# Altium PCB 基于NB-IOT光照计设计电路.PcbDoc
Units mil, origin at the board's own origin, x right, y up, seen from the top; angles counter-clockwise.
Board outline 6000 x 4000 mil, 2 copper layers (Top Layer, Bottom Layer); 31 components, 43 nets, 205 pads, 0 vias.
Unrouted connection lines stored in the file: 3.
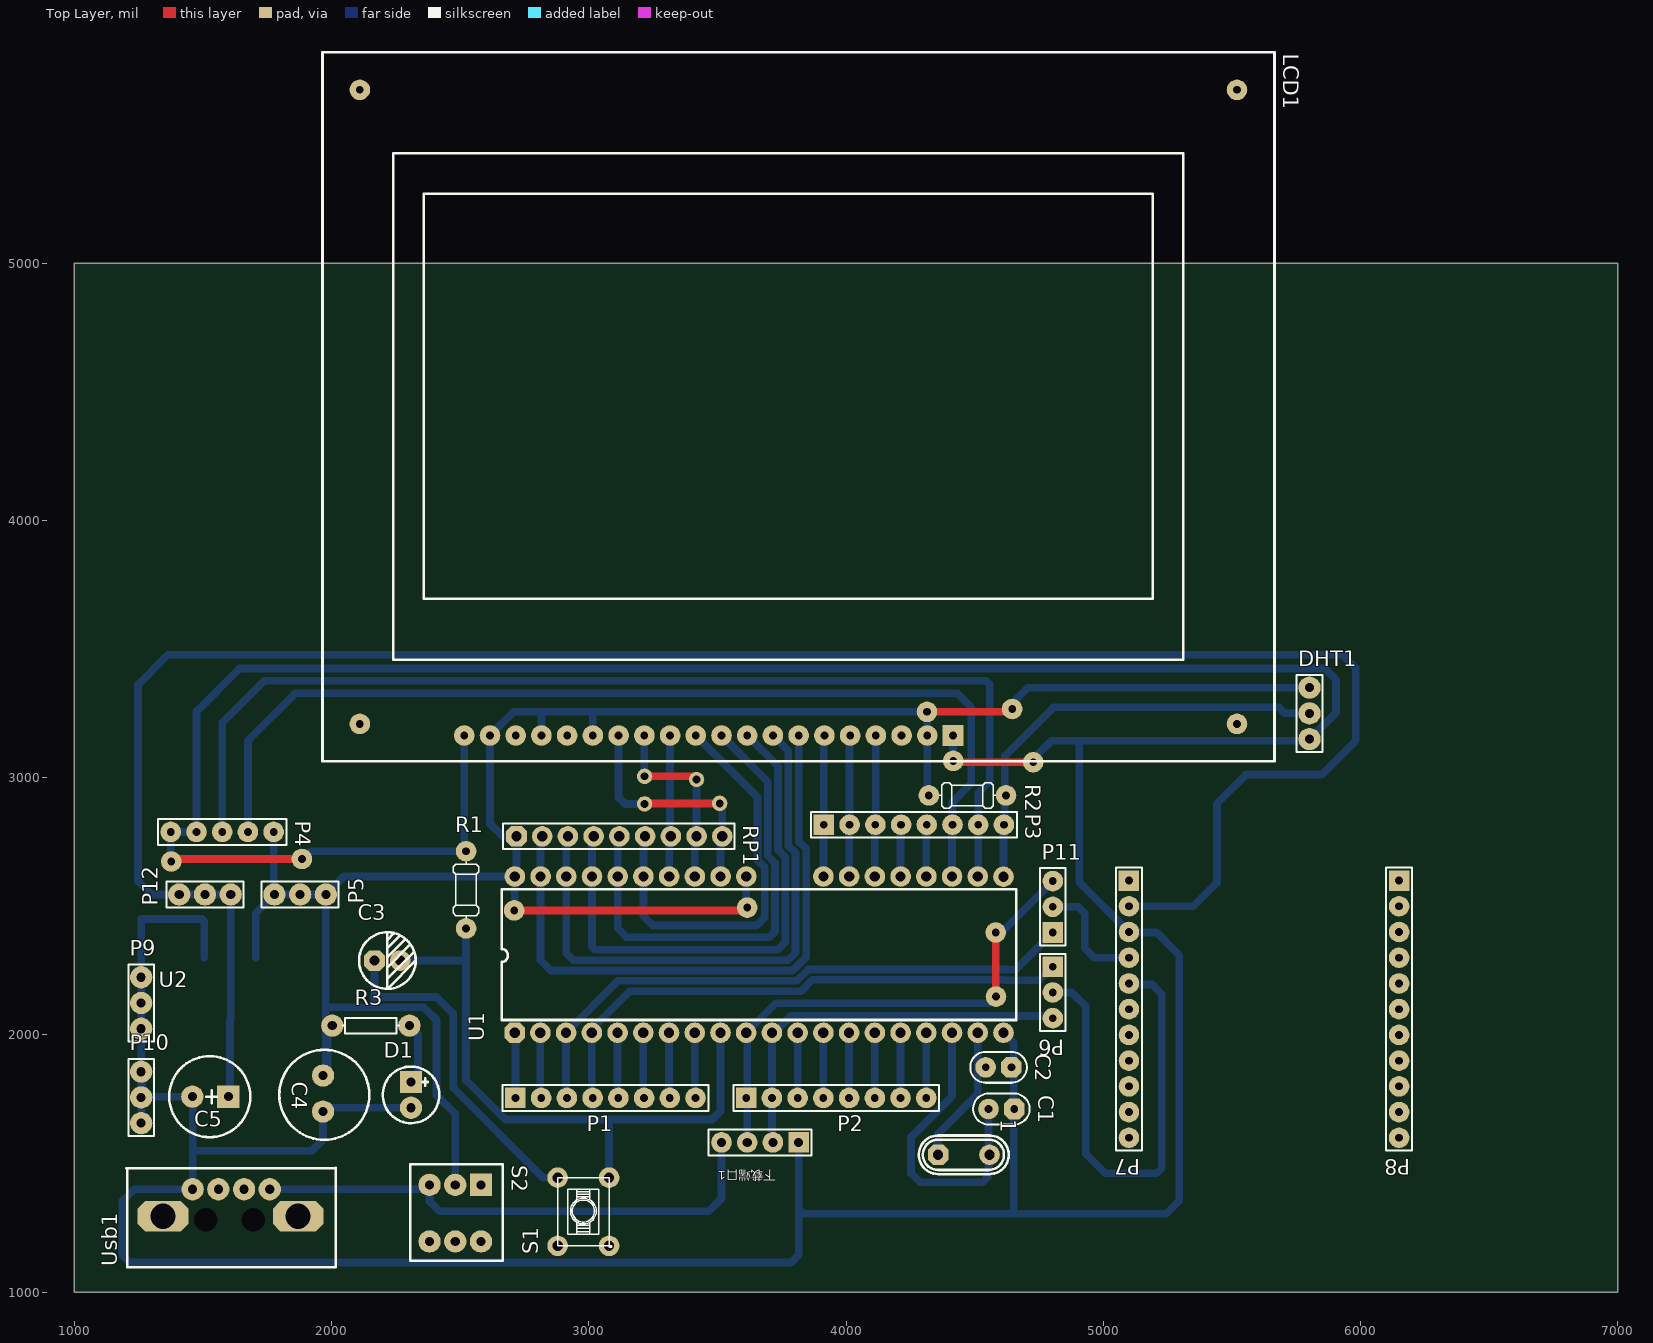
[diagram p0: Top Layer view]
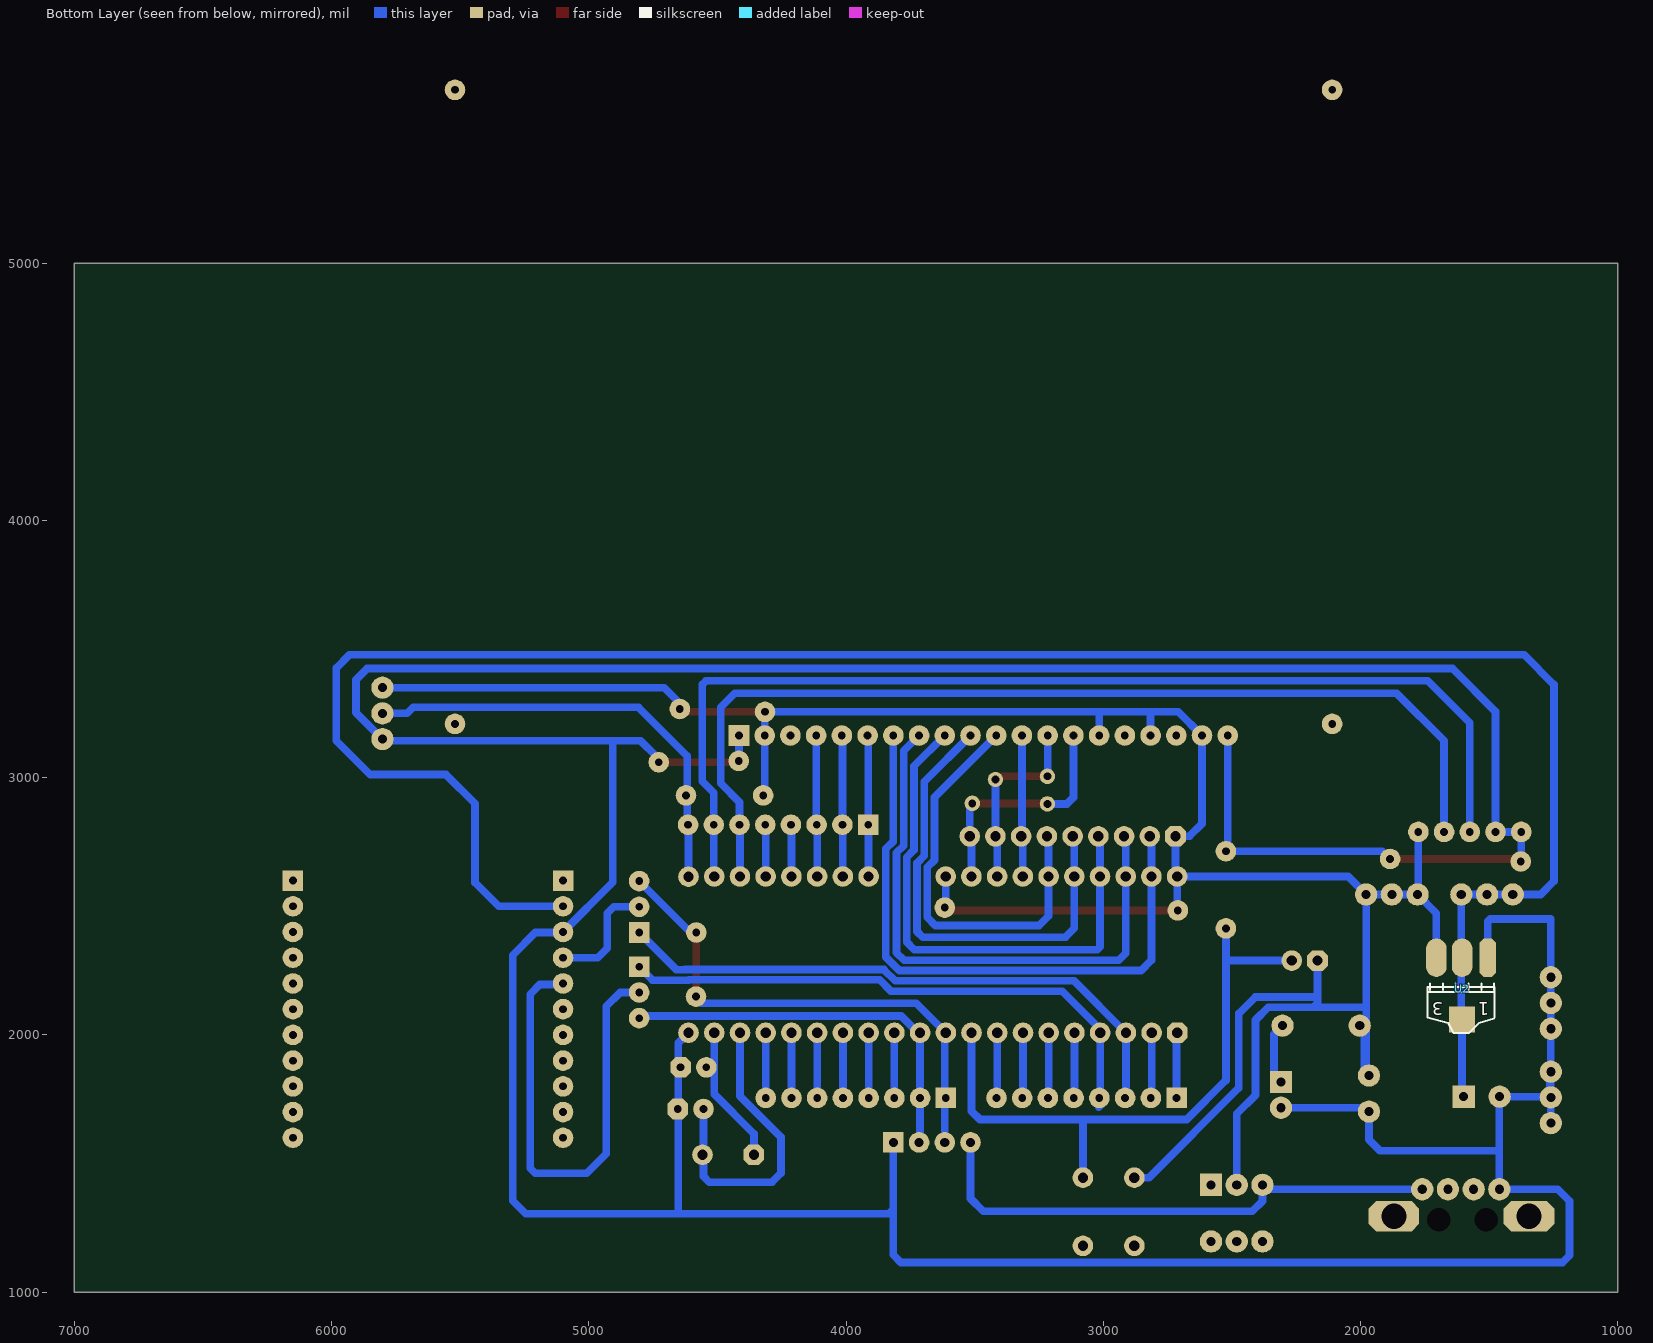
[diagram p1: Bottom Layer view, seen from below]

## Layer stack, top to bottom
Top Layer: signal copper 1.4
Dielectric: dielectric 12.6, FR-4, Dk 4.8
Bottom Layer: signal copper 1.4

## Board outline
1000,1000 7000,1000 7000,5000 1000,5000

## Design rules (kind name [scope] priority, off if disabled: settings)
Clearance [All] p1: gap=10
PolygonConnect [All] p1: connectstyle=Relief reliefconductorwidth=10 reliefentries=4 polygonreliefangle="90 Angle"
RoutingVias [All] p1: holewidth=28 width=50 viastyle="Through Hole" minholewidth=28 minwidth=50 maxholewidth=28 maxwidth=50
SilkscreenOverComponentPads [IsPad] p1: minsilkscreentomaskgap=10
SolderMaskExpansion [All] p1: expansion=4
Width [All] p1: maxlimit=50 minlimit=30 preferedwidth=40 minimp=50.000000 maximp=50.000000 favimp=50.000000
27 further rules are at their usual default settings.

## Components (designator, comment, footprint, x,y, rotation, side; value= is the part's Value field where it differs from the comment)
1 "XTAL" 4.直插晶振 4358,1534 r0 top
C1 "30pf" 2.瓷片电容 4554,1712 r0 top
C2 "30pf" 2.瓷片电容 4543,1874 r0 top
C3 "10UF" C100A 2167,2289 r0 top
C4 "Cap" CAP 1967,1842 r270 top
C5 "Cap Pol1" Cap+ 1599,1760 r180 top
D1 "LED0" LED-2 2309,1817 r0 top
DHT1 "Header 3" HDR1X3#1 5802,3150 r90 top
LCD1 "" LCD12864 4416,3164 r0 top locked
P1 "Header 8" HDR1X8 2715,1755 r0 top
P2 "Header 8" HDR1X8 3612,1755 r0 top
P3 "Header 8" HDR1X8 3914,2817 r0 top
P4 "Header 5" HDR1X5 1375,2789 r0 top
P5 "" HDR1X3#1 1978,2546 r180 top
P6 "" HDR1X3#2 4804,2265 r270 top
P7 "Header 11" HDR1X11 5100,2600 r270 top locked
P8 "Header 11" HDR1X11 6150,2600 r270 top
P9 "" HDR1X3#1 1260,2024 r90 top
P10 "" HDR1X3#1 1260,1657 r90 top
P11 "" HDR1X3#3 4804,2398 r90 top
P12 "" HDR1X3#1 1608,2546 r180 top
R1 "10K" "R-300 1/4W" 2523,2414 r90 top
R2 "5.1K" "R-300 1/4W" 4322,2931 r0 top
R3 "Res1" AXIAL-0.3 2003,2036 r0 top
RP1 "RESPACK-8" 3.排阻 2719,2772 r0 top
S1 "" KEY1 2879,1180 r90 top
S2 "SW-DPDT" swichX6 2581,1417 r270 top
U1 "STC12C5A60S2" DIP-40 3657,2312 r90 top locked
U2 "AMS1117-3.3" AMS1117 1505,2305 r180 top
Usb1 "USB" USB-A 1760,1400 r90 top
下载端口1 "气体" HDR1X4 3816,1582 r180 top

## Footprints (in the part's own frame and the unit in brackets; to place one, negate y for a bottom-side part, rotate by r counter-clockwise, add the part's x,y. Pads: shape width x height; smd on the part's side, far side on the other; paste and mask are expansions set on the pad)
2.瓷片电容 [mil]
  oct 80x80 hole 30: 1(100,0)
  round 80 hole 30: 2(0,0)
  silkscreen extent -60,-60 160,60
3.排阻 [mil]
  oct 80x80 hole 40: 1(0,0)
  round 80 hole 40: 2(100,0) 3(200,0) 4(300,0) 5(400,0) 6(500,0) 7(600,0) 8(700,0) 9(800,0)
  silkscreen extent -52,-50 848,50, body extent -40,-25 846,24, height 209
4.直插晶振 [mil]
  oct 80x80 hole 40: 1(0,0)
  round 80 hole 40: 2(200,0)
  silkscreen extent -75,-75 275,75, body extent -111,-90 315,88, height 138
AMS1117 [mil]
  oct 65x150 smd far side: 1(-0.03,4.94)
  rect 100x100 smd far side: 2(-100.03,244.94)
  oval 80x150 smd far side: 2(-100.03,4.94) 3(-200.03,4.94)
AXIAL-0.3 [mm]
  round 2.2 hole 0.9: 1(0,0) 2(7.62,0)
  silkscreen extent 1.04,-0.76 6.58,0.76
C100A [mil]
  oct 80x80 hole 40: 1(0,0)
  round 80 hole 40: 2(100,0)
  silkscreen extent -60,-110 160,110, body extent -74,-123 176,127, height 296
CAP [mm]
  round 2.2 hole 0.9: 1(0,0) 2(3.556,0)
  silkscreen extent -2.54,-4.32 6.35,4.57
Cap+ [mm]
  rect 2.2x2.2 hole 0.9: 1(0,0)
  round 2.2 hole 0.9: 2(3.556,0)
  silkscreen extent -2.16,-4 5.84,4
DIP-40 [mil]
  oct 80x80 hole 40: 1(-303.88,945.19)
  round 80 hole 40: 2(-303.63,845.17) 3(-303.63,745.15) 4(-303.63,645.13) 5(-303.63,545.11) 6(-303.62,445.09) 7(-303.62,345.07) 8(-303.62,245.05) 9(-303.62,145.03) 10(-303.62,45.01) 11(-303.62,-55.01) 12(-303.62,-155.03) 13(-303.62,-255.05) 14(-303.62,-355.07) 15(-303.62,-455.09) 16(-303.62,-555.11) 17(-303.62,-655.13) 18(-303.62,-755.15) 19(-303.62,-855.17) 20(-303.62,-955.19) 21(303.04,-955.19) 22(303.88,-855.21) 23(303.88,-755.23) 24(303.88,-655.25) 25(303.88,-555.28) 26(303.88,-455.3) 27(303.88,-355.32) 28(303.88,-255.34) 31(303.88,44.59) 32(303.88,144.57) 33(303.88,244.55) 34(303.88,344.53) 35(303.88,444.5) 36(303.87,544.48) 37(303.87,644.46) 38(303.87,744.44) 39(303.87,844.42) 40(303.87,944.39)
  round 0 all layers, no hole: 29(303.88,-155.36) 30(303.88,-55.39)
  silkscreen extent -254,-1005 254,996, body extent -304,-1031 306,1034, height 224
HDR1X3#1 [mm] "Conn"
  round 2.2 hole 0.9: 1(0,0) 2(2.54,0) 3(5.08,0)
  silkscreen extent -1.27,-1.27 6.35,1.27
HDR1X3#2 [mm]
  rect 2.032x2.032 hole 0.762 paste+0: 1(0,0)
  round 2.032 hole 0.762 paste+0: 2(2.54,0) 3(5.08,0)
  silkscreen extent -1.27,-1.27 6.35,1.27
HDR1X3#3 [mm]
  rect 2.032x2.032 hole 0.762: 1(0,0)
  round 2.032 hole 0.762: 2(2.54,0) 3(5.08,0)
  silkscreen extent -1.27,-1.27 6.35,1.27
HDR1X4 [mil]
  rect 80x80 hole 35.43: 1(0,0)
  round 80 hole 35.43: 2(100,0) 3(200,0) 4(300,0)
  silkscreen extent -50,-50 350,50
HDR1X5 [mil] "Conn"
  round 80 hole 30: 1(0,0) 2(100,0) 3(200,0) 4(300,0) 5(400,0)
  silkscreen extent -50,-50 450,50
HDR1X8 [mil] "Conn"
  rect 80x80 hole 30: 1(0,0)
  round 80 hole 30: 2(100,0) 3(200,0) 4(300,0) 5(400,0) 6(500,0) 7(600,0) 8(700,0)
  silkscreen extent -50,-50 750,50
HDR1X11 [mil] "Conne"
  rect 80x80 hole 30: 1(0,0)
  round 80 hole 30: 2(100,0) 3(200,0) 4(300,0) 5(400,0) 6(500,0) 7(600,0) 8(700,0) 9(800,0) 10(900,0) 11(1000,0)
  silkscreen extent -50,-50 1050,50
KEY1 [mil]
  round 80 hole 40: 1(0,0) 1(265,0) 2(0,-200) 2(265,-200)
  silkscreen extent -5,-210 265,0, body extent -33,-219 293,37, height 169
LCD12864 [mil]
  round 80 hole 30: 0(-2306,45) 0(-2306,2510) 0(1104,45) 0(1104,2510) 2(-100,0) 3(-200,0) 4(-300,0) 5(-400,0) 6(-500,0) 7(-600,0) 8(-700,0) 9(-800,0) 10(-900,0) 11(-1000,0) 12(-1100,0) 13(-1200,0) 14(-1300,0) 15(-1400,0) 16(-1500,0) 17(-1600,0) 18(-1700,0) 19(-1800,0) 20(-1900,0)
  rect 80x80 hole 30: 1(0,0)
  silkscreen extent -2451,-100 1250,2656
LED-2 [mm]
  rect 2.2x2.2 hole 0.9: 1(0,0)
  round 2.2 hole 0.9: 2(0,-2.54)
  silkscreen extent -2.79,-4.06 2.79,1.52
"R-300 1/4W" [mil]
  round 80 hole 30: 1(0,0) 2(300,0)
  silkscreen extent 40,-50 260,50, body extent -10,-41 310,35, height 93
swichX6 [mm]
  rect 2.2x2.2 hole 0.9: 1(0,0)
  round 2.2 hole 0.9: 2(0,-2.54) 3(0,-5.08) 4(5.588,-5.08) 5(5.588,-2.54) 6(5.588,0)
  silkscreen extent -2.03,-6.98 7.49,2.16
USB-A [mm]
  round 2.2 hole 0.9: 1(0,0) 2(0,2.54) 3(0,5.08) 4(0,7.62)
  round 2.032 hole 2.3: 5(-3.006,6.331) 5(-3.006,1.632)
  oct 3x5 hole 2.5: 5(-2.667,10.541) 5(-2.667,-2.794)
  silkscreen extent -7.71,-6.5 2.13,14.15

## Part data
C4: "C"
C5: "Polarized Capaci"
D1: "Typical INFRA"
DHT1: "Header, 3-Pin"
P1 P2 P3: "Header, 8-Pin"
P4: "Header, 5-Pin"
P5 P6 P9 P10 P11 P12: library part "Header 3", "Header, 3-Pin"
P7 P8: "Header, 11-Pin"
S2: "Double-Pole, Double-Thro"
下载端口1: library part "Header 4"

## Free pads (board coordinates)
  round 80 hole 30: 0(3616,2495) 0(4582,2398) 1(2710,2484) 1(4583,2149) 6(1885,2684) 7(1377,2674) 8(4315,3256) 9(4646,3267) 10(4417,3065) 11(4728,3060)
  round 60 hole 30: 2(3217,2898) 3(3217,3005) 4(3509,2900) 5(3419,2993)

## Nets (pads, with @x,y where several pads share a name; then routed paths per layer and width w, separated by ;. In a path a pad name is that pad's centre, name@x,y a point inside that pad or via, vN(x,y) a via of type N, cw(c..) or ccw(c..) an arc to the next point about the centre after c; other vN are vias at no path point)
CLK: DHT1.2 P3.8 R2.2 U1.21 | length 1753.2
  Bottom Layer w30: U1.21 4612.19,2815.19 P3.8 ; P3.8@4636,2815 4617,2834 4617,3084 4807,3274 5682,3274 5706,3250 DHT1.2
EN: LCD1.6 P3.1 U1.28 | length 546.8
  Bottom Layer w30: U1.28 3912.34,2815.34 P3.1 LCD1.6@3914,3162
GND: C1.1 C2.1 C4.2 C5.2 D1.2 DHT1.1 LCD1.1 LCD1.20 P4.1 P4.2 P7.3 P9.1 P9.2 P9.3 P10.1 P10.2 P10.3 pad.6 pad.7 pad.10 pad.11 R1.2 U1.20 U2.1 Usb1.4 下载端口1.1 | length 19232.5
  Top Layer w30: pad.7@1377,2684 pad.6 ; pad.10@4422,3060 pad.11
  Bottom Layer w30: P10.1@1239,1678 P10.1 P10.2 P10.3@1260,1851 ; pad.7 1375,2676 P4.1 P4.2 1475,3257 1642,3424 5862,3424 5905,3381 5905,3253 DHT1.1 5796,3144 4907,3144 ; U2.1 1505.03,2441.97 1496,2451 1260,2451 P9.3 P9.2 P9.1 P10.3 P10.3@1260,1851 ; pad.6 1915,2714 R1.2 ; D1.2 1982,1717 C4.2 1967,1593 1924,1550 1460,1550 ; R1.2@2516,2721 LCD1.20 ; 3816,1322 3833,1305 5245,1305 5296,1356 5296,2310 5208,2398 P7.3@5110,2398 ; 下载端口1.1 3816,1145 3786,1115 1215,1115 1187,1143 1187,1354 1233,1400 Usb1.4 1460,1550 ; LCD1.1 4416,3082 pad.10@4417,3081 ; U1.20 4652,1968.56 4652,1305 ; pad.11@4736,3081 4799,3144 4907,3144 ; P7.3 4907,2593 4907,3144 ; P10.3@1260,1851 1263,1854 1263,1760 C5.2 1460,1759 1460,1550
NC: P7.1 P8.1
NetD1_1: D1.1 R3.2 | length 181
  Bottom Layer w30: D1.1@2336,1822 2336,2003
NetP1_1: P1.1 U1.1 | length 249.9
  Bottom Layer w30: P1.1 U1.1@2715,2004.94
NetP1_2: P1.2 U1.2 | length 254.7
  Bottom Layer w30: U1.2 2811.83,1758.17 P1.2
NetP1_5: P1.5 U1.5 | length 250.3
  Bottom Layer w30: P1.5@3111.89,1758.11 U1.5
NetP1_6: P1.6 U1.6 | length 254.7
  Bottom Layer w30: U1.6 3211.91,1758.09 P1.6
NetP1_7: P1.7 U1.7 | length 254.6
  Bottom Layer w30: U1.7 3311.93,1758.07 P1.7
NetP1_8: P1.8 U1.8 | length 254.6
  Bottom Layer w30: U1.8 3411.95,1758.05 P1.8
NetP2_3: P2.3 U1.12 | length 253.4
  Bottom Layer w30: P2.3 U1.12
NetP2_4: P2.4 U1.13 | length 253.4
  Bottom Layer w30: P2.4 P2.4 U1.13
NetP2_5: P2.5 U1.14 | length 253.4
  Bottom Layer w30: P2.5 4012.07,1755.07 U1.14
NetP2_6: P2.6 U1.15 | length 253.4
  Bottom Layer w30: P2.6 4112.09,1755.09 U1.15
NetP2_7: P2.7 U1.16 | length 253.4
  Bottom Layer w30: P2.7 4212.11,1755.11 U1.16
NetP2_8: P2.8 U1.17 | length 253.4
  Bottom Layer w30: P2.8 4312.13,1755.13 U1.17
NetP3_4: P3.4 U1.25 | length 201.8
  Bottom Layer w30: U1.25 4212.28,2815.28 P3.4
NetP3_5: P3.5 U1.24 | length 201.8
  Bottom Layer w30: U1.24 4312.25,2815.25 P3.5
NetP6_2: P6.2 P7.5 | length 1885.9
  Bottom Layer w30: P6.2 4878,2165 4932,2111 4932,1538 5008,1462 5208,1462 5228,1482 5228,2158 5190,2196 P7.5@5093,2196
NetP7_4: P7.4 P11.2 | length 457.7
  Bottom Layer w30: P11.2 4903,2498 4928,2473 4928,2337 4965,2300 P7.4
P0.0: LCD1.7 RP1.2 U1.39 | length 2428.4
  Bottom Layer w30: RP1.2 2812.58,2765.58 U1.39 2812.58,2290.42 2853,2250 3792,2250 3845,2303 3845,2723 3816,2752 LCD1.7
P0.1: LCD1.8 RP1.3 U1.38 | length 2252.9
  Bottom Layer w30: RP1.3 2912.56,2765.56 U1.38 2912.56,2317.44 2940,2290 3774,2290 3804,2320 3804,2707.43 3776,2735.43 3776,3104 LCD1.8
P0.2: LCD1.9 RP1.4 U1.37 | length 2065.2
  Bottom Layer w30: RP1.4 3012.54,2765.54 U1.37 3012.54,2342.46 3024,2331 3734,2331 3764,2361 3764,2690.86 3736,2718.86 3736,3044 LCD1.9
P0.3: LCD1.10 RP1.5 U1.36 | length 1843.2
  Bottom Layer w30: RP1.5 3112.52,2765.52 U1.36 3112.52,2414.48 3147,2380 3702,2380 3724,2402 3724,2668 3696,2696 3696,2984 LCD1.10
P0.4: LCD1.11 RP1.6 U1.35 | length 1630.5
  Bottom Layer w30: RP1.6 3212.5,2765.5 U1.35 3212.5,2462.5 3250,2425 3652,2425 3684,2457 3684,2651.43 3656,2679.43 3656,2924 LCD1.11
P0.5: LCD1.12 RP1.7 U1.34 | length 552.1
  Bottom Layer w30: U1.34 3312.47,2765.47 RP1.7 3316,2775 LCD1.12
P0.6: LCD1.13 pad.3 pad.5 RP1.8 U1.33 | length 725.9
  Top Layer w30: pad.3 pad.5@3407,3005
  Bottom Layer w30: LCD1.13 3216,3020 pad.3@3219,3017 ; U1.33 3412.45,2765.45 RP1.8 pad.5 3419,2998 pad.5@3417,3000
P0.7: LCD1.14 pad.2 pad.4 RP1.9 U1.32 | length 923.3
  Top Layer w30: pad.2@3219,2900 pad.4
  Bottom Layer w30: LCD1.14 3116,2923 3141,2898 pad.2@3207,2898 ; pad.4 3519,2890 RP1.9 3512.43,2765.43 U1.32
RES: C3.2 R1.1 S1.2 U1.9 | length 2494.2
  Bottom Layer w30: C3.2 2519,2289 ; 2523,2190 2523,2244 ; R1.1 2523,2244 ; S1.2@3079,1445 3079,1668 3082,1671 ; U1.9 3511.97,1703.97 3479,1671 2675,1671 2523,1823 2523,2244
RS: LCD1.4 P3.3 U1.26 | length 549.7
  Bottom Layer w30: U1.26 4112.3,2815.3 P3.3 4116,2819 LCD1.4
RW: LCD1.5 P3.2 U1.27 | length 549.6
  Bottom Layer w30: U1.27 4012.32,2815.32 P3.2 4014,3162 LCD1.5
RXD: P2.1 P11.3 pad.0@4582,2398 pad.1@4583,2149 U1.10 下载端口1.3 | length 2006.3
  Top Layer w30: pad.1@4582,2150 pad.0@4582,2398
  Bottom Layer w30: 下载端口1.3 U1.10@3616,2004.37 ; U1.10@3619,2015.38 U1.10 3726.62,2123 4564,2123 4567,2126 pad.1@4567,2164 ; pad.0@4603,2397 P11.3
RXD1: P1.3 P11.1 U1.3 | length 2301.8
  Bottom Layer w30: P1.3@2911.85,1758.15 U1.3 3113.48,2210 3808.57,2210 3852.57,2254 4626.49,2254 4627.49,2253 4659,2253 P11.1@4802,2396
SCL: P3.6 P4.4 U1.23 | length 3951
  Bottom Layer w30: P4.4 1675,3143 1860,3328 4432,3328 4487,3273 4487,2978 4414,2905 P3.6 ; U1.23 P3.6@4412.23,2815.23
SDA: P3.7 P4.3 U1.22 | length 4245.7
  Bottom Layer w30: P4.3 1575,3214 1738,3377 4544,3377 4559,3362 4559,2986 4514,2941 P3.7 U1.22@4514,2617.67
TXD: P2.2 P6.3 U1.11 下载端口1.2 | length 1544.8
  Bottom Layer w30: 下载端口1.2@3712.01,1585.99 U1.11 3720.11,2008.38 3785.11,2073.38 4795.62,2073.38 P6.3
TXD1: P1.4 P6.1 U1.4 | length 2180.3
  Bottom Layer w30: P1.4@3017,1719 3011.87,1724.13 U1.4 3011.87,2021.87 3160,2170 3825.14,2170 3869.14,2214 4609.92,2214 4610.92,2213 4752,2213 P6.1@4791,2252
VCC: C3.1 C4.1 DHT1.3 LCD1.2 LCD1.15 LCD1.17 LCD1.19 P4.5 P5.1 P5.2 P5.3 pad.0@3616,2495 pad.1@2710,2484 pad.8 pad.9 R2.1 R3.1 RP1.1 S1.1 S2.2 U1.31 U1.40 U2.3 | length 10352.5
  Top Layer w30: pad.1@2710,2484 pad.0@3605,2484 ; pad.8 4635,3256 pad.9
  Bottom Layer w30: U2.3 1705.03,2473.03 P5.3 P5.2 P5.1 ; P5.3@1775,2549 P4.5 ; C4.1 1985,1860 R3.1@1985,2034 ; C4.1@1978,1853 1978,2108 ; 2167,2114 C3.1 ; 2167,2123.43 2182.43,2108 ; 2167,2150 2170,2147 2409,2147 2473,2083 2473,1794 2822,1445 S1.1@2879,1445 ; S2.2 2481,1693 2408,1766 2408,2058 2359,2107 2183.43,2107 2182.43,2108 ; pad.1@2710,2499 2712.61,2496.39 U1.40 2047.88,2615.88 P5.1 ; U1.40@2719,2617.53 RP1.1 2665,2772 2616,2821 LCD1.19 2708,3256 2822,3256 ; LCD1.17 2816,3250 2822,3256 ; LCD1.15 3016,3255 3015,3256 ; U1.31 3612.41,2505.59 pad.0@3614,2504 ; pad.8 3015,3256 ; R2.1@4316,2946 LCD1.2 4316,3239 pad.8@4317,3240 ; pad.9@4644,3290 4647,3290 4707,3350 DHT1.3 ; 1978,2108 P5.1 ; 1978,2108 2182.43,2108 ; 2822,3256 3015,3256
VCC_3.3V: C5.1 P7.2 P12.1 P12.2 P12.3 U2.2 | length 8345.8
  Bottom Layer w30: C5.1 1605.03,1766.03 U2.2@1605.03,2060.06 ; U2.2@1608,2063.03 P12.1 P12.2 P12.3 1299,2546 1248,2597 1248,3362 1364,3478 5930,3478 5982,3426 5982,3144 5850,3012 5555,3012 5442,2899 5442,2592 5350,2500 P7.2
VCC_5V: S2.3 Usb1.1 下载端口1.4 | length 2057.3
  Bottom Layer w30: Usb1.1 S2.3@2364,1400 ; S2.3 2381,1354 2421,1314 3466,1314 3516,1364 下载端口1.4
XT1: 1.2 C1.2 U1.18 | length 1199.3
  Bottom Layer w30: U1.18 4412.15,1762.15 4253,1603 4253,1462 4288,1427 4531,1427 4554,1450 C1.2
XT2: 1.1 C2.2 U1.19 | length 602.1
  Bottom Layer w30: 1.1 4358,1616 4512.17,1770.17 4512.17,1876.83 4515,1874 C2.2@4552,1874 ; C2.2@4512.17,1854 U1.19
pads on no net: LCD1.0 LCD1.3 LCD1.16 LCD1.18 P7.6 P7.7 P7.8 P7.9 P7.10 P7.11 P8.2 P8.3 P8.4 P8.5 P8.6 P8.7 P8.8 P8.9 P8.10 P8.11 S2.1 S2.4 S2.5 S2.6 U1.29 U1.30 Usb1.2 Usb1.3 Usb1.5

## Text inside footprints (layer, text, board x,y; h text height)
U2: Bottom Overlay "3" at 1679.03,2127.06 h50 r180; Bottom Overlay "1" at 1499.03,2127.06 h50 r180